# Altium PCB POWER MANAGEMENT V2.PcbDoc
Units mm, origin at the board's own origin, x right, y up, seen from the top; angles counter-clockwise.
Board outline 60 x 50 mm, 2 copper layers (Top Layer, Bottom Layer), stack 1.671 mm thick; 40 components, 30 nets, 114 pads, 15 vias.
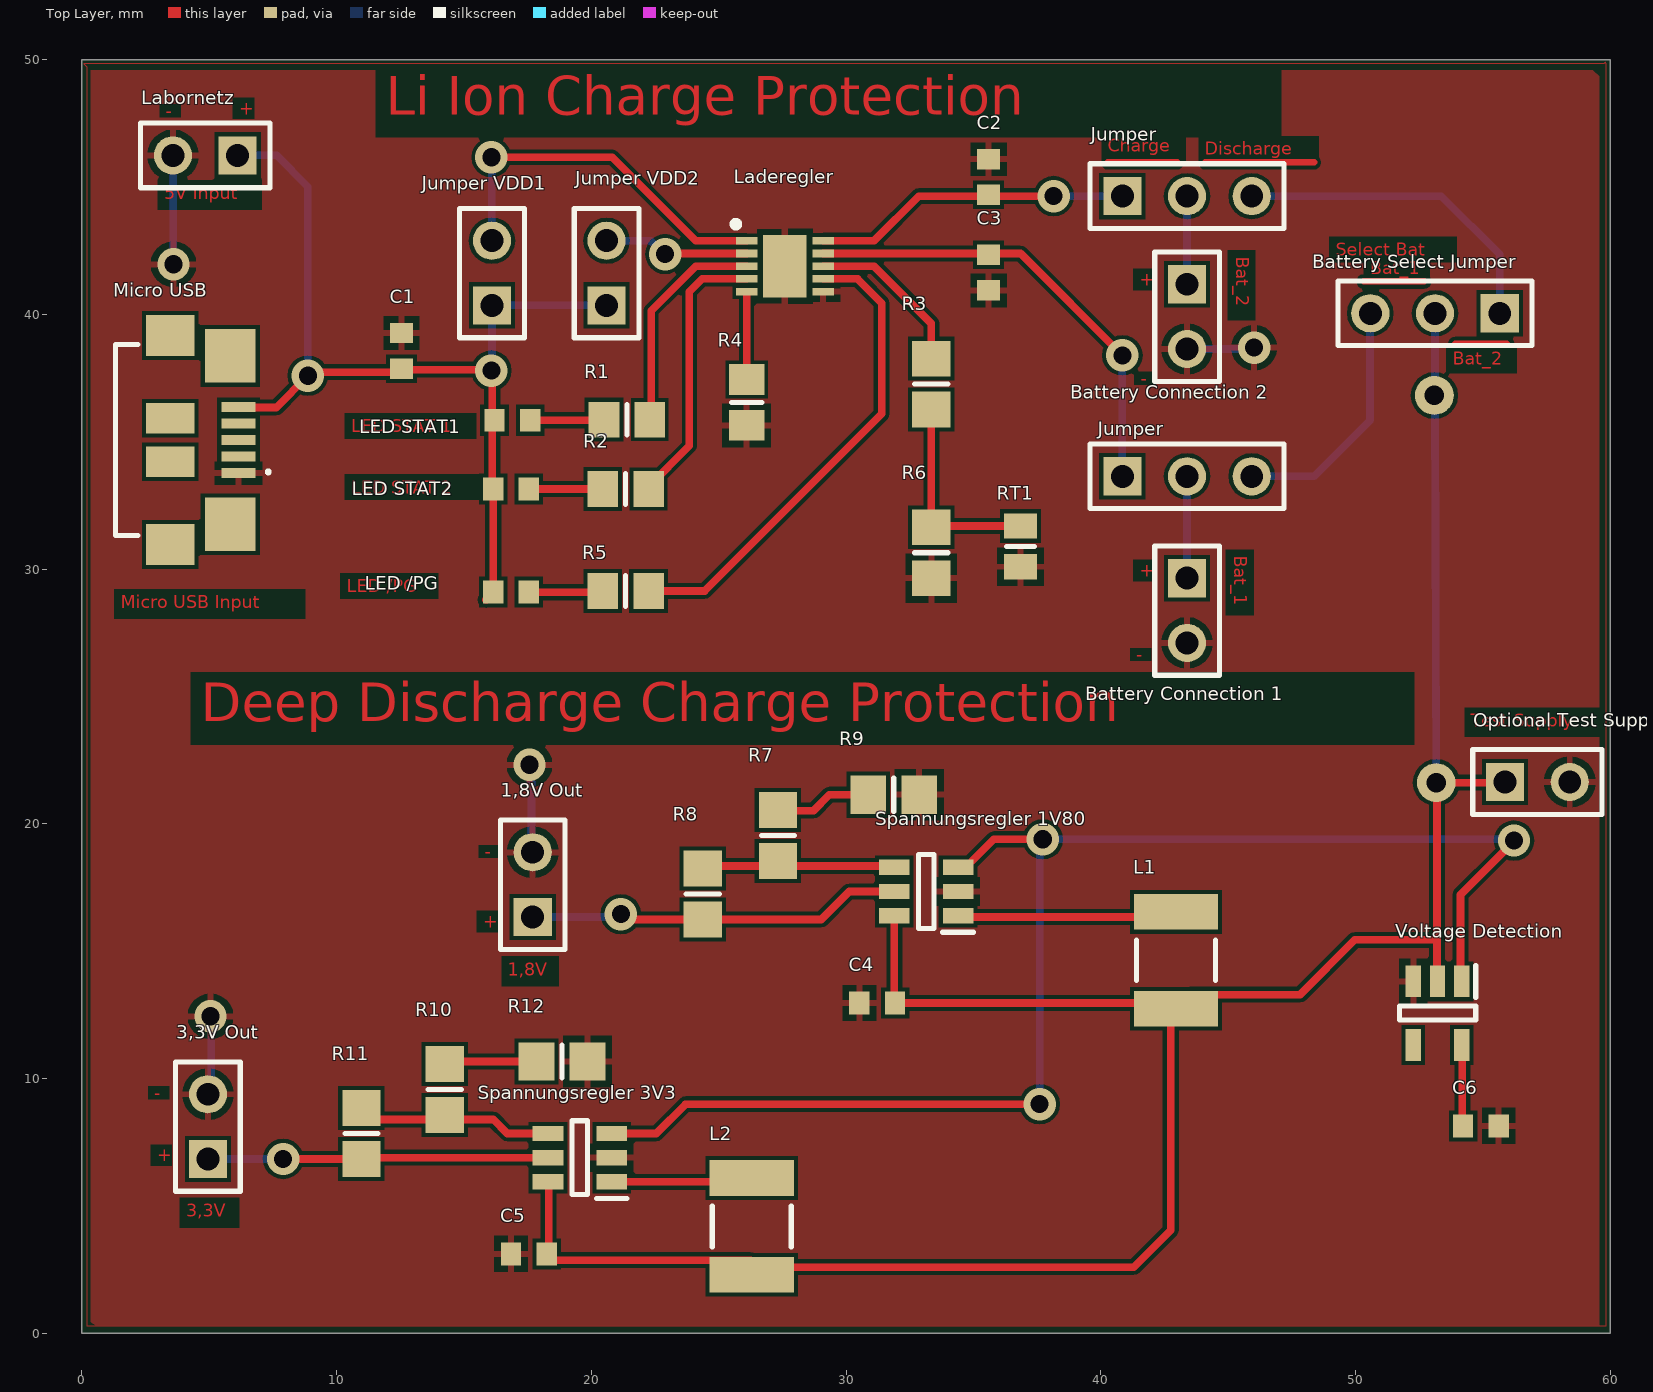
[diagram p0: Top Layer view]
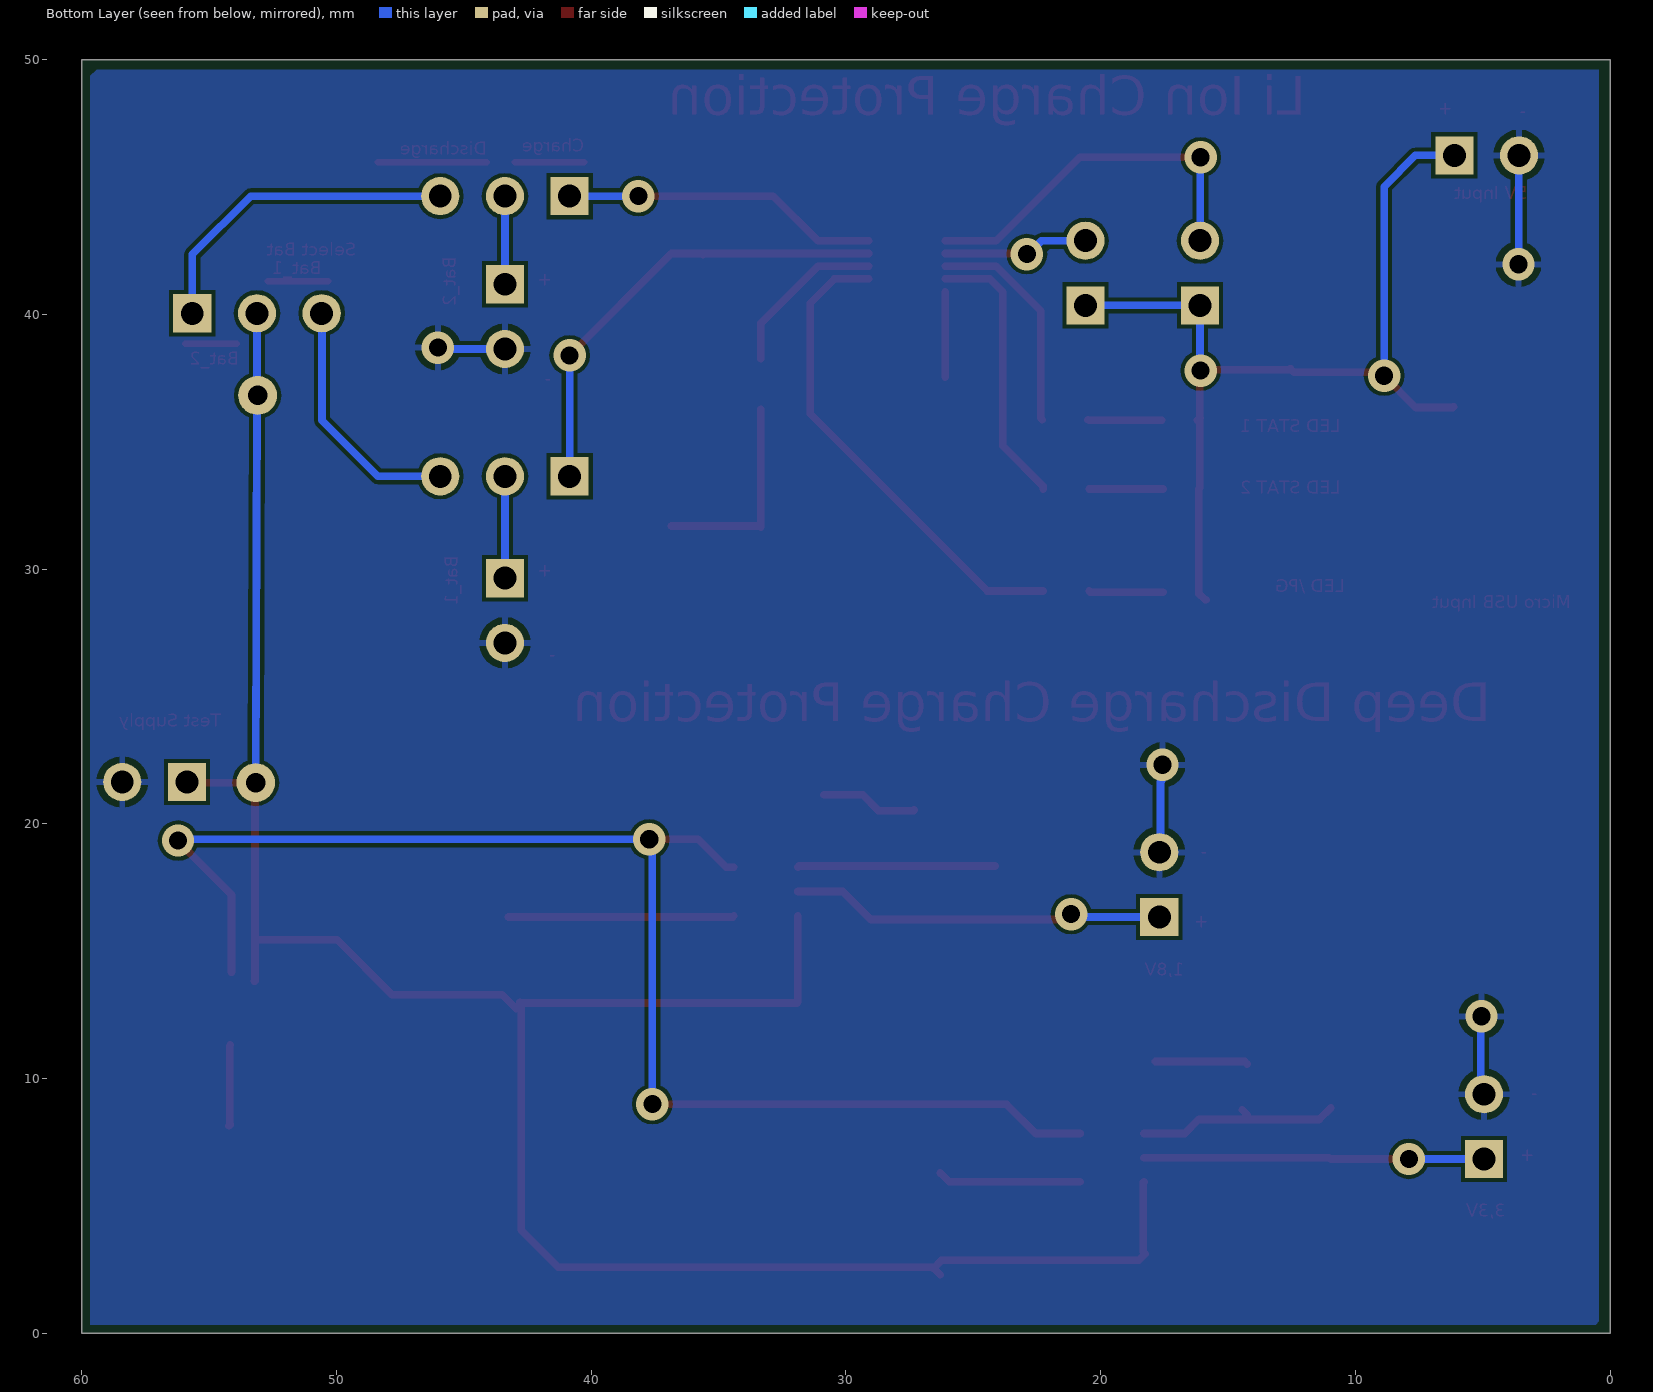
[diagram p1: Bottom Layer view, seen from below]

## Layer stack, top to bottom
Top Solder: solder mask 0.0102, Solder Resist, Dk 3.5
Top Layer: signal copper 0.0356
Dielectric 1: dielectric 1.6, FR-4, Dk 4.8
Bottom Layer: signal copper 0.0356
Bottom Solder: solder mask 0.0102, Solder Resist, Dk 3.5

## Board outline
0,0 60,0 60,50 0,50

## Design rules (kind name [scope] priority, off if disabled: settings)
Clearance [All] p1: gap=0.15 ignorepadtopadclearanceinfootprint=TRUE
MinimumSolderMaskSliver [All] p1: minsoldermaskwidth=0.1
PolygonConnect [All] p1: connectstyle=Relief reliefconductorwidth=0.254 reliefentries=4 polygonreliefangle="90 Angle" airgapwidth=0.254
RoutingVias [All] p1: holewidth=0.6 width=1 viastyle="Through Hole" minholewidth=0.6 minwidth=1 maxholewidth=0.6 maxwidth=1
SilkToSilkClearance [All] p1: silktosilkclearance=0.1
SilkToSolderMaskClearance [IsPad] p1: minsilkscreentomaskgap=0.1 clearancetoexposedcopper=TRUE
SolderMaskExpansion [All] p1: expansion=0.102
Width [All] p1: maxlimit=0.5 minlimit=0.125 preferedwidth=0.3
27 further rules are at their usual default settings.

## Components (designator, comment, footprint, x,y, rotation, side; value= is the part's Value field where it differs from the comment)
"1,8V Out" "Header 2" HDR1X2 17.7,16.35 r90 top
"3,3V Out" "Header 2" HDR1X2 4.95,6.85 r90 top
"Battery Connection 1" "Header 2" HDR1X2 43.39,29.65 r270 top
"Battery Connection 2" "Header 2" HDR1X2 43.39,41.19 r270 top
"Battery Select Jumper" "Header 3" HDR1X3 55.665,40.05 r180 top
C1 "Cap" 1608[0603] 12.55,38.575 r270 top value=4,7µF
C2 "Cap" 1608[0603] 35.6,45.4 r270 top value=4,7µF
C3 "Cap" 1608[0603] 35.6,41.65 r90 top value=4,7µF
C4 "Cap" 1608[0603] 31.225,12.975 r180 top value=10µF
C5 "Cap" 1608[0603] 17.55,3.125 r180 top value=10µF
C6 "Cap" 1608[0603] 54.925,8.15 r180 top value=4,7µF
Jumper "Header 3" HDR1X3 40.85,33.65 r0 top
Jumper "Header 3" HDR1X3 40.85,44.65 r0 top
"Jumper VDD1" "Header 2" HDR1X2 16.1,40.36 r90 top
"Jumper VDD2" "Header 2" HDR1X2 20.6,40.36 r90 top
L1 "Inductor" INDC4532 42.95,14.65 r270 top value=4,7µH
L2 "Inductor" INDC4532 26.3,4.2 r270 top value=4,7µH
Labornetz "" HDR1X2 6.115,46.25 r180 top
Laderegler "MCP73833T-AMI_MF" SON50P300X300X100-11N-D 27.6,41.9 r0 top
"LED /PG" "LED1" 1608[0603] 16.85,29.1 r0 top
"LED STAT1" "LED1" 1608[0603] 16.9,35.85 r0 top
"LED STAT2" "LED1" 1608[0603] 16.85,33.15 r0 top
"Micro USB" "ZX62R-B-5P_30_" ZX62R-B-5P(30) 1.325,35.075 r270 top
"Optional Test Supply" "Header 2" HDR1X2 55.875,21.65 r0 top
R1 "Res3" 6-0805_N 21.4,35.875 r0 top value=330
R2 "Res3" 6-0805_N 21.35,33.15 r0 top value=330
R3 "Res3" 6-0805_M 33.35,37.271 r90 top value=1K
R4 "Res3" 6-0805_N 26.1,36.55 r270 top value=1K
R5 "Res3" 6-0805_N 21.35,29.15 r0 top value=330
R6 "Res3" 6-0805_M 33.35,30.65 r90 top value=1K
R7 "Res3" 6-0805_M 27.325,19.55 r90 top value=51K
R8 "Res3" 6-0805_M 24.375,17.25 r90 top value=150K
R9 "Res3" 6-0805_M 31.875,21.15 r0 top value=6,8K
R10 "Res3" 6-0805_M 14.25,9.575 r90 top value=20k
R11 "Res3" 6-0805_M 10.975,7.85 r90 top value=150k
R12 "2,2k" 6-0805_M 18.85,10.675 r0 top value=6,8K
RT1 "Res Thermal" 6-0805_L 36.85,30.9 r270 top
"Spannungsregler 1V80" "TLV61220DBVR" SOT95P280X145-6N 33.15,17.35 r180 top
"Spannungsregler 3V3" "TLV61220DBVR" SOT95P280X145-6N 19.55,6.9 r180 top
"Voltage Detection" "NCP302LSN20T1G" SOT95P275X110-5N 53.225,12.575 r270 top

## Footprints (in the part's own frame and the unit in brackets; to place one, negate y for a bottom-side part, rotate by r counter-clockwise, add the part's x,y. Pads: shape width x height; smd on the part's side, far side on the other; paste and mask are expansions set on the pad)
6-0805_L [mm] "Chip Resistor, Body 2.0x1.2mm, IPC High Density"
  rect 1x1.3 smd: 1(-0.8,0) 2(0.8,0)
  silkscreen extent 0,-0.55 0,0.55, body extent -1.07,-0.7 1.07,0.7, height 0.7
6-0805_M [mm] "Chip Resistor, Body 2.0x1.2mm, IPC Low Density"
  rect 1.4x1.5 smd: 1(-1,0) 2(1,0)
  silkscreen extent 0,-0.65 0,0.65, body extent -1.07,-0.7 1.07,0.7, height 0.7
6-0805_N [mm] "Chip Resistor, Body 2.0x1.2mm, IPC Medium Density"
  rect 1.2x1.4 smd: 1(-0.9,0) 2(0.9,0)
  silkscreen extent 0,-0.6 0,0.6, body extent -1.07,-0.7 1.07,0.7, height 0.7
1608[0603] [mm] "Chip Capacitor, Body 1.6x0.8mm, IPC High Density"
  rect 0.8x0.9 smd: 1(-0.7,0) 2(0.7,0)
  body extent -0.87,-0.48 0.87,0.48, height 1.3
HDR1X2 [mm] "Connector; Header; 2 Position"
  rect 1.5x1.5 hole 0.9: 1(0,0)
  round 1.5 hole 0.9: 2(2.54,0)
  silkscreen extent -1.27,-1.27 3.81,1.27
HDR1X3 [mm] "Connector; Header; 3 Position"
  rect 1.5x1.5 hole 0.9: 1(0,0)
  round 1.5 hole 0.9: 2(2.54,0) 3(5.08,0)
  silkscreen extent -1.27,-1.27 6.35,1.27
INDC4532 [mm] "Chip Inductor, Body 4.5x3.2mm, IPC High Density"
  rect 1.4x3.3 smd: 1(-1.9,0) 2(1.9,0)
  silkscreen extent -0.8,-1.55 0.8,1.55, body extent -2.4,-1.7 2.4,1.7, height 0.55
SON50P300X300X100-11N-D [mm]
  rect 0.85x0.3 smd: 1(-1.5,1) 2(-1.5,0.5) 3(-1.5,0) 4(-1.5,-0.5) 5(-1.5,-1) 6(1.5,-1) 7(1.5,-0.5) 8(1.5,0) 9(1.5,0.5) 10(1.5,1)
  rect 1.7x2.45 smd: 11(0,0)
  silkscreen extent -2.05,1.53 -1.8,1.77, body extent -1.55,-1.5 1.55,1.5, height 1
SOT95P275X110-5N [mm]
  rect 1.25x0.6 smd: 1(-1.25,0.95) 2(-1.25,0) 3(-1.25,-0.95) 4(1.25,-0.95) 5(1.25,0.95)
  silkscreen extent -1.88,-1.5 0.28,1.5, body extent -1.37,-1.5 1.38,1.5, height 1.1
SOT95P280X145-6N [mm]
  rect 1.2x0.6 smd: 1(-1.25,0.95) 2(-1.25,0) 3(-1.25,-0.95) 4(1.25,-0.95) 5(1.25,0) 6(1.25,0.95)
  silkscreen extent -1.85,-1.45 0.3,1.6, body extent -1.4,-1.45 1.4,1.45, height 1.45
ZX62R-B-5P(30) [mm]
  rect 0.4x1.35 smd: 1(1.3,4.825) 2(0.65,4.825) 3(0,4.825) 4(-0.65,4.825) 5(-1.3,4.825)
  rect 2.1x2 smd: 6(-3.3,4.5) 7(3.3,4.5)
  rect 1.6x1.9 smd: 8(-4.1,2.15) 9(4.1,2.15)
  rect 1.2x1.9 smd: 10(-0.85,2.15) 11(0.85,2.15)
  silkscreen extent -3.75,0 3.75,6.02, body extent -3.1,-0.23 5.7,2.71, height 5.6

## Part data
"1,8V Out" "3,3V Out" "Battery Connection 1" "Battery Connection 2" "Jumper VDD1" "Jumper VDD2" "Optional Test Supply": "Header, 2-Pin", LatestRevisionDate=17-Jul-2002, LatestRevisionNote="Re-released for DXP Platform.", Publisher="Altium Limited"
"Battery Select Jumper" Jumper Jumper: "Header, 3-Pin", LatestRevisionDate=17-Jul-2002, LatestRevisionNote="Re-released for DXP Platform.", Publisher="Altium Limited"
C1 C2 C3 C4 C5 C6: "Capacitor", LatestRevisionDate=17-Jul-2002, LatestRevisionNote="Re-released for DXP Platform.", PackageDescription="Radial Cap, Thru-Hole; 2 Leads; 0.3 in Pin Spacing", PackageReference=RAD-0.3, Published=8-Jun-2000, Publisher="Altium Limited"
Labornetz: library part "Header 2", "Header, 2-Pin", LatestRevisionDate=17-Jul-2002, LatestRevisionNote="Re-released for DXP Platform.", Publisher="Altium Limited"
Laderegler: "Integrated Circuit", Manufacturer_Name=Microchip, Manufacturer_Part_Number=MCP73833T-AMI/MF, Mouser2 Part Number=579-MCP73833T-AMI/MF, Datasheet Link=https://componentsearchengine.com//MCP73833T-AMI_MF.pdf, Height=1mm, Mouser2 Price/Stock=https://www.mouser.com/Search/Refine.aspx?Keyword=579-MCP73833T-AMI%2FMF
"LED /PG" "LED STAT1" "LED STAT2": "Typical RED GaAs LED", LatestRevisionDate=08-Jul-2005, LatestRevisionNote="Mech Layer 1 removed.", PackageDescription="LED; 2 Leads", PackageReference=LED-1, Published=8-Jun-2000, Publisher="Altium Limited"
"Micro USB": "Connector", Manufacturer_Name=Hirose, Manufacturer_Part_Number=ZX62R-B-5P(30)
R1 R2 R3 R4 R5 R6 R7 R8 R9 R10 R11: "Resistor", LatestRevisionDate=29-May-2009, LatestRevisionNote="IPC-7351 Footprint Added.", PackageDescription="Chip Resistor", PackageReference=J1-0603, Published=8-Jun-2000, Publisher="Altium Limited"
R12: library part Res3, "Resistor", LatestRevisionDate=29-May-2009, LatestRevisionNote="IPC-7351 Footprint Added.", PackageDescription="Chip Resistor", PackageReference=J1-0603, Published=8-Jun-2000, Publisher="Altium Limited"
RT1: "Thermistor", Code_IPC=RESC2012, LatestRevisionDate=29-May-2009, LatestRevisionNote="IPC-7351 Footprint Added.", PackageDescription="Chip Resistor 0805 Case Size", PackageReference=6-0805, PackageVersion=Mar-2003, Published=24-Mar-1999, Publisher="Altium Limited"
"Spannungsregler 1V80" "Spannungsregler 3V3": "Integrated Circuit", Manufacturer_Name="Texas Instruments", Mouser2 Part Number=595-TLV61220DBVR, Datasheet Link=http://www.ti.com/lit/gpn/tlv61220, Height=1.45mm, Manufacturer_Part_Number=TLV61220DBVR, Mouser2 Price/Stock=https://www.mouser.com/Search/Refine.aspx?Keyword=595-TLV61220DBVR
"Voltage Detection": "Integrated Circuit", Manufacturer_Name="ON Semiconductor", Datasheet Link=http://www.onsemi.com/pub/Collateral/NCP302-D.PDF, Height=1.1mm, Manufacturer_Part_Number=NCP302LSN20T1G
L1 L2: Code_IEC=1005, Code_JEITA=0402, LatestRevisionDate=29-May-2009, LatestRevisionNote="IPC-7351 Footprint Added.", PackageDescription="Chip Inductor", PackageReference=0402-A, Published=8-Jun-2000, Publisher="Altium Limited"

## Free pads (board coordinates)
  round 1.524 hole 0.762: 2(53.175,21.625) 3(53.1,36.825)

## Via types
v1: diameter 1.27, hole 0.711, Top Layer to Bottom Layer, 15 vias

## Nets (pads, with @x,y where several pads share a name; then routed paths per layer and width w, separated by ;. In a path a pad name is that pad's centre, name@x,y a point inside that pad or via, vN(x,y) a via of type N, cw(c..) or ccw(c..) an arc to the next point about the centre after c; other vN are vias at no path point)
1,8V: "1,8V Out.1" "Spannungsregler 1V80.5" R8.1 | length 14.9
  Top Layer w0.3: 17.7,16.35 17.91,16.14 ; v1(21.16,16.46) 21.37,16.25 R8.1 29.025,16.25 30.125,17.35 31.9,17.35
  Bottom Layer w0.3: 17.7,16.35 20.985,16.35 v1@21.025,16.39
3,3V: "3,3V Out.1" "Spannungsregler 3V3.5" R11.1 | length 13.4
  Top Layer w0.3: v1@7.875,6.825 v1(7.9,6.85) R11.1 11.025,6.9 18.3,6.9
  Bottom Layer w0.3: 4.95,6.85 v1(7.9,6.85)
"5V Ladespannung": "Jumper VDD1.1" "Jumper VDD2.1" "LED /PG.1" "LED STAT1.1" "LED STAT2.1" "Micro USB.5" C1.2 Labornetz.1 | length 38.2
  Top Layer w0.3: Labornetz.1@5.94,46.25 Labornetz.1 Labornetz.1@6.215,46.15 ; 6.15,36.375 6.175,36.35 7.625,36.35 v1(8.875,37.6) 9.012,37.737 12.413,37.737 C1.2 12.588,37.837 16.037,37.837 v1(16.075,37.8) 16.113,37.762 16.113,35.938 ; 15.85,28.8 15.9,28.8 16.15,29.05 16.15,29.1 16.15,33.15 16.113,33.188 16.113,35.938 ; 16.09,40.35 16.1,40.36 16.15,40.31 ; 16.1,35.95 16.113,35.938 ; 16.2,35.85 16.113,35.938
  Bottom Layer w0.3: Labornetz.1@6.215,46.15 Labornetz.1 7.65,46.25 8.875,45.025 v1(8.875,37.6) ; v1(16.075,37.8) 16.1,37.825 16.1,40.36 20.6,40.36
"Battery 1 Output": "Battery Select Jumper.3" Jumper.3@45.93,33.65 | length 10.1
  Bottom Layer w0.3: Jumper.3@46.16,33.88 45.93,33.65 48.375,33.65 50.575,35.85 50.575,40.04 50.585,40.05
"Battery 2 Output": "Battery Select Jumper.1" Jumper.3@45.93,44.65 | length 13.6
  Top Layer w0.3: Jumper.3@45.93,44.07 Jumper.3@45.93,44.65
  Bottom Layer w0.3: Jumper.3@45.93,44.65 53.375,44.65 55.665,42.36 55.665,40.05
"Chosen Battery Output": "Battery Select Jumper.2" "Optional Test Supply.1" "Spannungsregler 1V80.6" "Spannungsregler 3V3.6" "Voltage Detection.2" C4.1 C5.1 L1.2 L2.2 pad.2 pad.3 | length 92
  Top Layer w0.3: 18.3,5.95 18.325,5.925 18.325,3.2 C5.1 18.5,2.875 26.25,2.875 L2.2@26.562,2.562 ; L2.2 26.6,2.6 41.3,2.6 42.75,4.05 L1.2@42.75,12.975 ; 31.9,16.4 31.9,13 C4.1 L1.2@42.75,12.975 ; L1.2@42.8,13 42.775,12.975 L1.2@42.75,12.975 ; L1.2 43.5,13.3 47.825,13.3 49.975,15.45 53.075,15.45 ; 53.225,13.825 53.2,13.85 53.2,21.6 pad.2 55.85,21.625 55.875,21.65
  Bottom Layer w0.3: 53.125,40.05 53.125,37.1 53.126,36.825 pad.2
GND: "1,8V Out.2" "3,3V Out.2" "Battery Connection 1.2" "Battery Connection 2.2" "Micro USB.1" "Optional Test Supply.2" "Spannungsregler 1V80.2" "Spannungsregler 3V3.2" "Voltage Detection.3" C1.1 C2.1 C3.1 C4.2 C5.2 C6.1 Labornetz.2 Laderegler.6 Laderegler.11 R4.2 R6.1 R9.2 R12.2 RT1.2 | length 12.4
  Top Layer w0.3: Labornetz.2 Labornetz.2@3.588,46.238 ; v1@3.588,41.988 v1(3.6,41.975)
  Bottom Layer w0.3: Labornetz.2 3.588,46.238 3.588,41.988 v1(3.6,41.975) ; v1(5.05,12.45) 5.075,12.425 5.075,9.165 ; v1@17.6,21.7 17.65,21.65 17.65,19.6 ; 43.39,38.65 45.975,38.65 v1(46.025,38.7)
  other v1: 17.575,22.325
"NetBattery Connection 1_1": "Battery Connection 1.1" Jumper.2@43.39,33.65 | length 4
  Bottom Layer w0.3: 43.39,29.65 Jumper.2@43.39,33.65
"NetBattery Connection 2_1": "Battery Connection 2.1" Jumper.2@43.39,44.65 | length 3.5
  Bottom Layer w0.3: 43.39,41.19 Jumper.2@43.39,44.65
NetC2_2: C2.2 Jumper.1@40.85,44.65 Laderegler.10 | length 12.5
  Top Layer w0.3: Laderegler.10 31.1,42.9 32.85,44.65 v1(38.15,44.65)
  Bottom Layer w0.3: v1(38.15,44.65) Jumper.1@40.85,44.65
NetC3_2: C3.2 Jumper.1@40.85,33.65 Laderegler.9 | length 18.2
  Top Layer w0.3: Laderegler.9 35.55,42.4 C3.2 35.65,42.4 36.85,42.4 v1(40.85,38.4)
  Bottom Layer w0.3: Jumper.1@40.85,33.65 v1(40.85,38.4)
NetC6_2: "Voltage Detection.5" C6.2 | length 3.2
  Top Layer w0.3: C6.2@54.175,8.2 C6.2@54.2,8.175 ; 54.175,11.325 54.2,11.3 C6.2@54.2,8.175 ; C6.2 C6.2@54.2,8.175
"NetJumper VDD1_2": "Jumper VDD1.2" Laderegler.1 | length 14.7
  Top Layer w0.3: v1(16.075,46.175) 20.825,46.175 24.1,42.9 Laderegler.1
  Bottom Layer w0.3: v1(16.075,46.175) 16.087,46.162 16.087,42.912 16.1,42.9
"NetJumper VDD2_2": "Jumper VDD2.2" Laderegler.2 | length 5.7
  Top Layer w0.3: v1(22.9,42.375) 22.925,42.4 24.85,42.4 Laderegler.2
  Bottom Layer w0.3: 20.6,42.9 22.325,42.9 22.85,42.375 v1(22.9,42.375)
NetL1_1: "Spannungsregler 1V80.1" L1.1 | length 8.9
  Top Layer w0.3: 34.4,16.4 34.45,16.35 L1.1@43.25,16.35
NetL2_1: "Spannungsregler 3V3.1" L2.1 | length 5.6
  Top Layer w0.3: 20.8,5.95 25.95,5.95 L2.1@26.3,6.3
NetLaderegler_3: Laderegler.3 R1.2 | length 8.8
  Top Layer w0.3: R1.2 22.35,35.925 22.35,40.15 24.1,41.9 Laderegler.3
NetLaderegler_4: Laderegler.4 R2.2 | length 10.9
  Top Layer w0.3: R2.2 22.25,33.25 23.85,34.85 23.85,40.9 24.35,41.4 Laderegler.4
NetLaderegler_5: Laderegler.5 R4.1 | length 3.4
  Top Layer w0.3: R4.1@26.1,37.55 Laderegler.5
NetLaderegler_7: Laderegler.7 R5.2 | length 19.1
  Top Layer w0.3: R5.2 24.45,29.15 31.4,36.1 31.4,40.45 30.45,41.4 Laderegler.7
NetLaderegler_8: Laderegler.8 R3.2 | length 6.6
  Top Layer w0.3: Laderegler.8 31.1,41.9 33.35,39.65 R3.2
"NetLED /PG_2": "LED /PG.2" R5.1 | length 2.9
  Top Layer w0.3: 17.55,29.1 20.4,29.1 R5.1
"NetLED STAT1_2": "LED STAT1.2" R1.1 | length 2.9
  Top Layer w0.3: 17.6,35.85 20.475,35.85 R1.1
"NetLED STAT2_2": "LED STAT2.2" R2.1 | length 2.9
  Top Layer w0.3: 17.55,33.15 R2.1
NetR3_1: R3.1 R6.2 RT1.1 | length 8.1
  Top Layer w0.3: R3.1 R6.2 33.4,31.7 RT1.1
NetR7_1: "Spannungsregler 1V80.4" R7.1 R8.2 | length 7.8
  Top Layer w0.3: R8.2@24.15,18.35 27.325,18.35 31.85,18.35 31.9,18.3
NetR7_2: R7.2 R9.1 | length 3.8
  Top Layer w0.3: R7.2 27.35,20.525 28.725,20.525 29.35,21.15 R9.1
NetR10_1: "Spannungsregler 3V3.4" R10.1 R11.2 | length 8
  Top Layer w0.3: R11.2 11.425,8.4 16.15,8.4 16.7,7.85 18.3,7.85 ; R10.1 R10.1@14.45,8.775
NetR10_2: R10.2 R12.1 | length 3.6
  Top Layer w0.3: R10.2 14.35,10.675 R12.1
"NetSpannungsregler 1V80_3": "Spannungsregler 1V80.3" "Spannungsregler 3V3.3" "Voltage Detection.1" | length 56
  Top Layer w0.3: 20.8,7.85 22.55,7.85 23.7,9 v1(37.6,9) ; 34.4,18.3 34.7,18.3 35.8,19.4 v1(37.725,19.4) ; 54.125,14.175 54.125,17.225 56.225,19.325 v1(56.225,19.35)
  Bottom Layer w0.3: v1(37.6,9) 37.6,19.275 v1(37.725,19.4) v1@56.175,19.4
pads on no net: "Micro USB.2" "Micro USB.3" "Micro USB.4" "Micro USB.6" "Micro USB.7" "Micro USB.8" "Micro USB.9" "Micro USB.10" "Micro USB.11" "Voltage Detection.4"
copper on no net: | length 11.4
  Top Layer w0.254: 40.275,45.975 43,45.975 ; 44.1,45.975 48.375,45.975 ; 50.325,41.3 52.7,41.3 ; 53.925,38.85 55.95,38.85

## Polygon pours and split planes (outlines as drawn)
GND on Top Layer "Top Layer-GND" (solid, pour order 2): 0.55,0.325 59.575,0.325 59.575,49.35 59.325,49.6 0.35,49.6 0.35,0.45 0.4,0.4
GND on Top Layer "Top Layer-No Net" (solid, shelved, pour order 0): 0.2,0.3 59.85,0.3 59.85,49.85 59.8,49.9 59.75,49.85 0.075,49.85 0.2,49.725
GND on Bottom Layer "Bottom Layer-GND" (solid, pour order 4): 59.669,0.343 59.669,49.368 59.419,49.618 0.444,49.618 0.444,0.468 0.569,0.343

## Other copper
Top Layer:
  text "+" at 6.175,47.85 h0.5
  text "Li Ion Charge Protection" at 11.925,47.85 h1.52
  text "-" at 3.3,47.75 h0.5
  text "Charge" at 40.275,46.4 h0.5
  text "Discharge" at 44.075,46.275 h0.5
  text "5V Input" at 3.225,44.525 h0.5
  text "Select Bat" at 49.225,42.3 h0.5
  text "Bat_2" at 45.325,42.275 h0.5 r270
  text "Bat_1" at 50.585,41.575 h0.5
  text "+" at 41.525,41.125 h0.5
  text "Bat_2" at 53.825,38.025 h0.5
  text "-" at 41.575,37.25 h0.5
  text "LED STAT 1" at 10.575,35.375 h0.5
  text "LED STAT 2" at 10.575,32.975 h0.5
  text "Bat_1" at 45.25,30.525 h0.5 r270
  text "+" at 41.525,29.7 h0.5
  text "LED /PG" at 10.4,29.1 h0.5
  text "Micro USB Input" at 1.525,28.475 h0.5
  text "-" at 41.4,26.4 h0.5
  text "Deep Discharge Charge Protection" at 4.675,24.025 h1.52
  text "Test Supply" at 54.525,23.825 h0.5
  text "-" at 15.825,18.675 h0.5
  text "+" at 15.75,15.925 h0.5
  text "1,8V" at 16.725,14.05 h0.5
  text "-" at 2.85,9.2 h0.5
  text "+" at 2.95,6.75 h0.5
  text "3,3V" at 4.1,4.575 h0.5